# Altium PCB ALTAIR_PD_Sergeant_V26.4c.PcbDoc (part 2 of 4)
Units mm, origin at the board's own origin, x right, y up, seen from the top; angles counter-clockwise.
Board outline 74 x 56 mm, 4 copper layers (Top Layer, Layer 1, Layer 2, Bottom Layer), stack 1.675 mm thick; 239 components, 159 nets, 760 pads, 127 vias.
Unrouted connection lines stored in the file: 489.
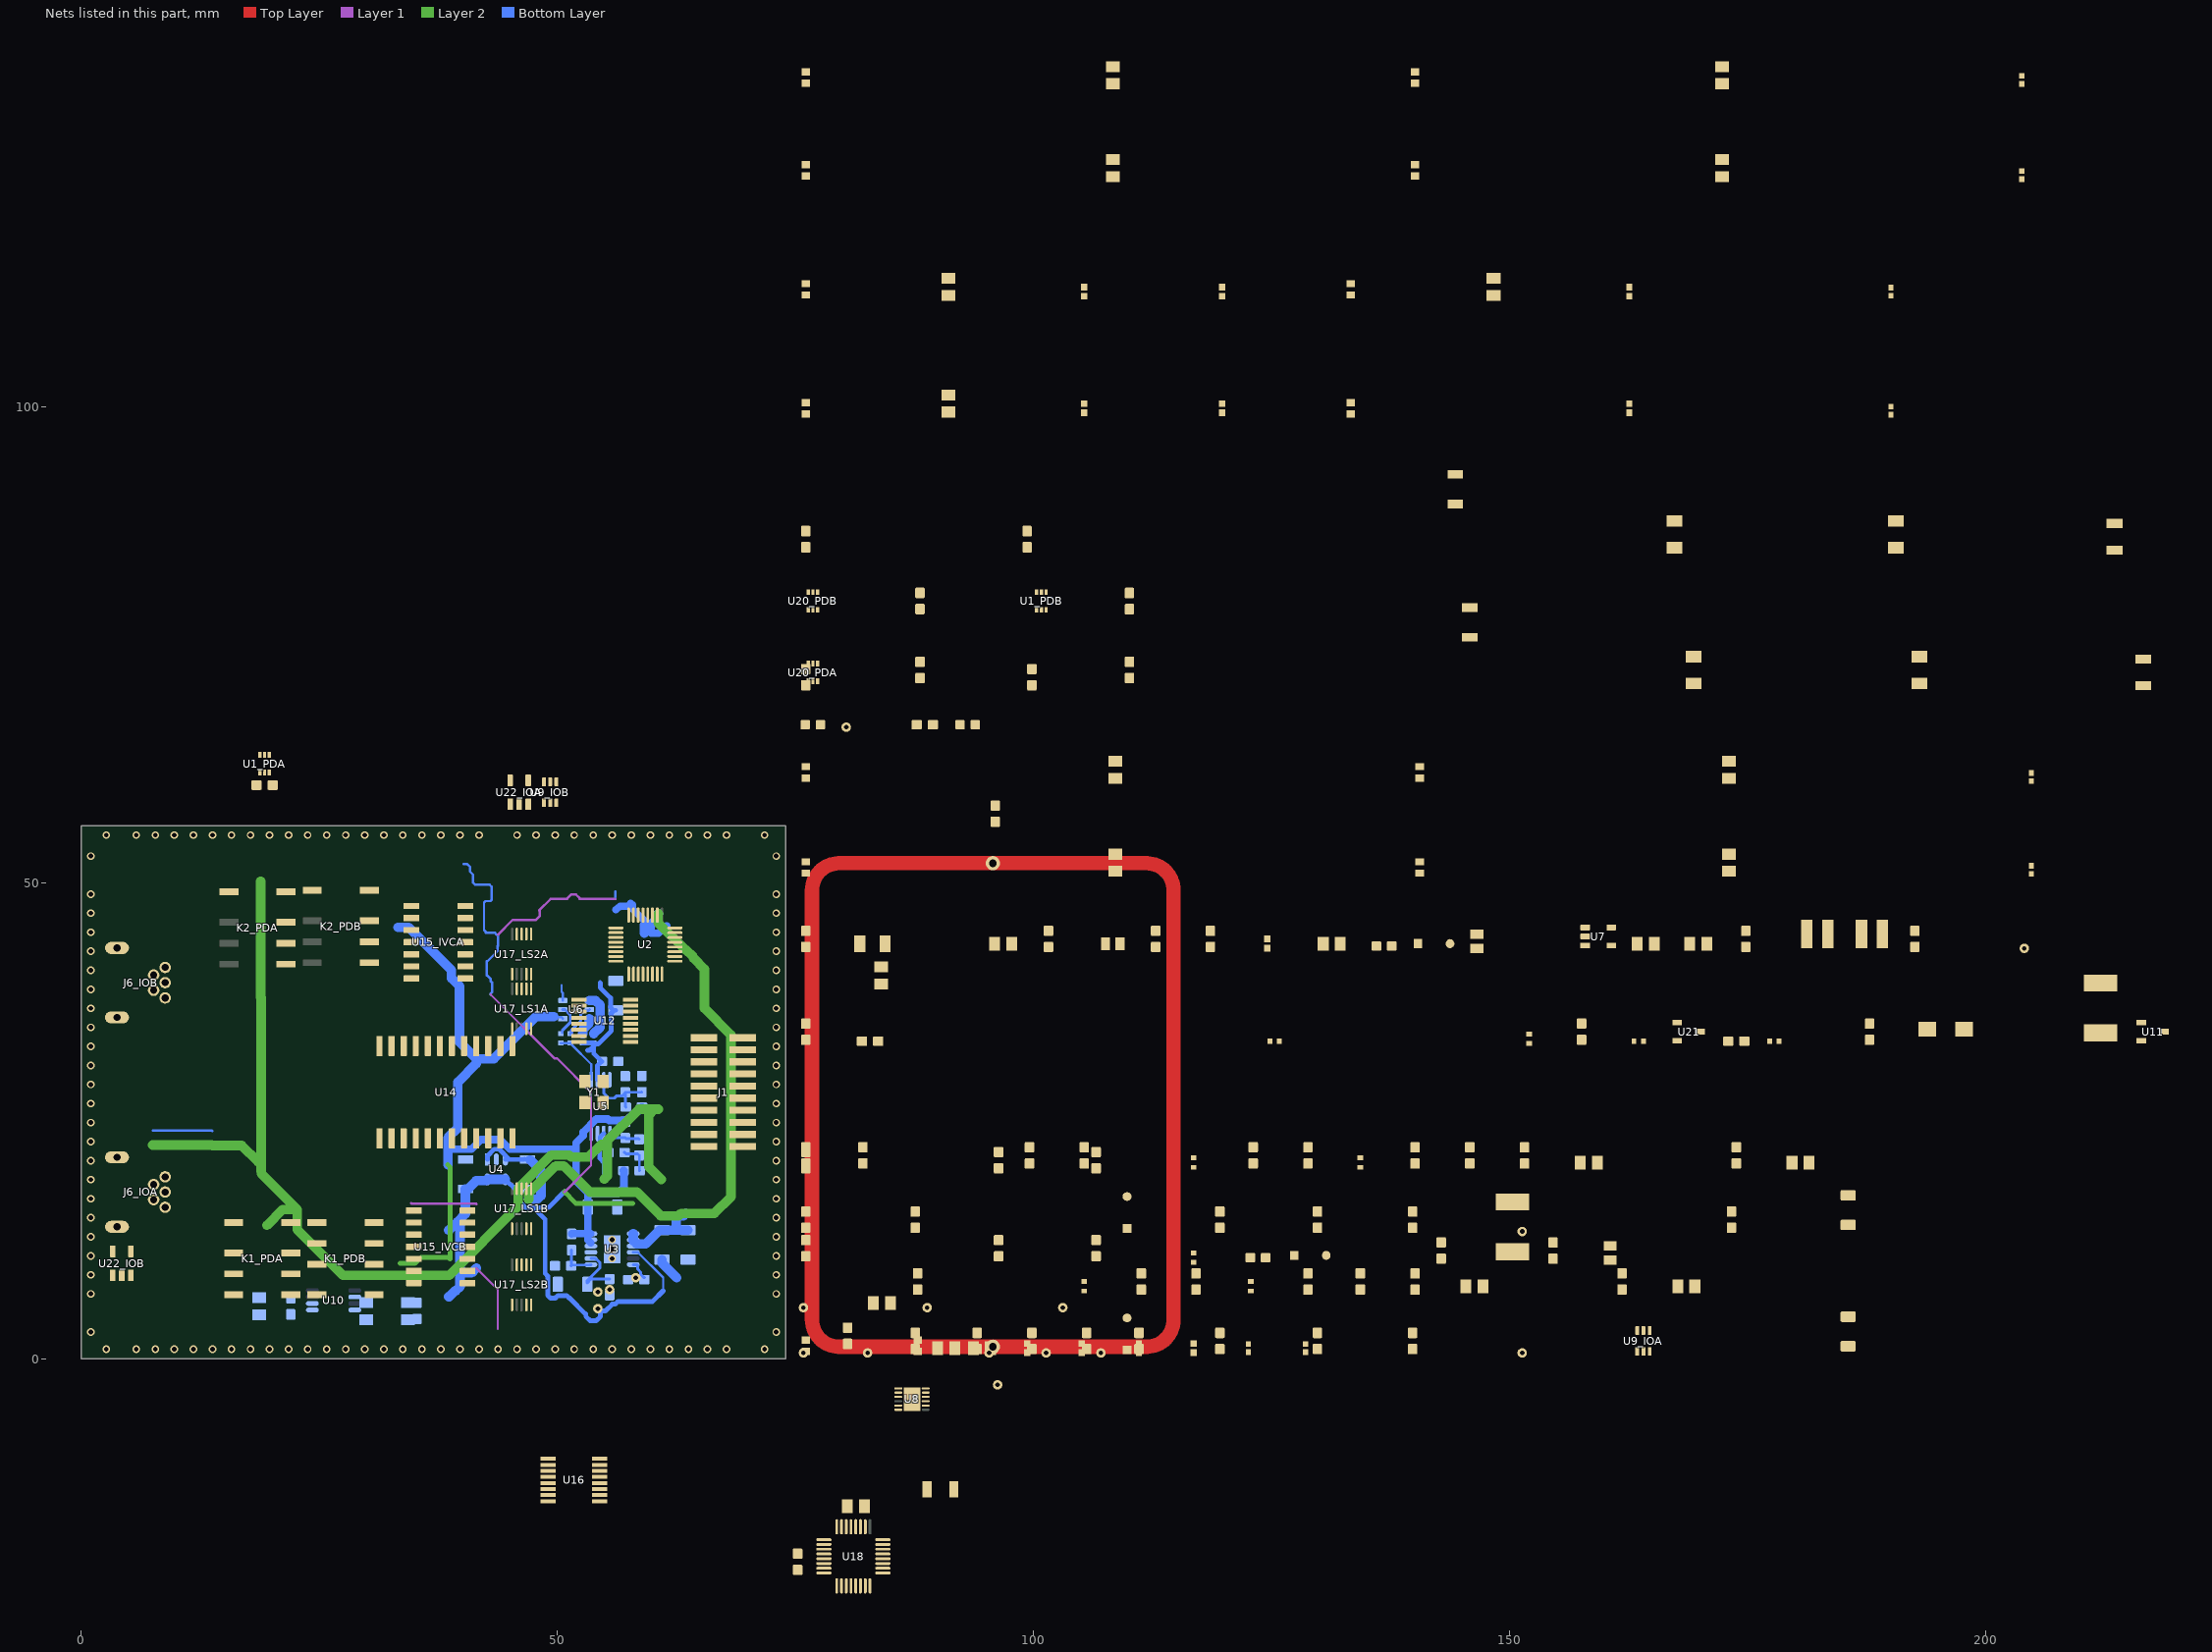
[diagram p4: the nets of this part, all layers, seen from the top]

## Part data
C00_IOA C0_IOA C00_IOB C0_IOB: library part CAP, "Murata GRT188R61H105KE13D - Cap Ceramic 1uF 10% 50V X5R 0603 (Placeholder)", MF=Murata, MP=GRT188R61H105KE13D
C1 C2 C3 C4 C12 C23_IOA C23_IOB: library part CAP, "Murata GRT319R6YA106KE01D - Cap Ceramic 10uF 35V X5R 10% Pad SMD 1206 85C Automotive T/R", MF=Murata, MP=GRT319R6YA106KE01D
C5 C10 C11 C13 C22_IOA C22_IOB C24 C25_PDA C25_PDB C26 C27 C29_PDA C29_PDB C32_IOA C32_IOB C33 C35 C37 C38_IVCA C38_IVCB C40_IVCA C40_IVCB C41 C42 C43_LS1A C43_LS1B C43_LS2A C43_LS2B C45_LS1A C45_LS1B C45_LS2A C45_LS2B C48 C50 C51 C53 C64 C65_PDA C65_PDB: library part CAP, "Kemet C0603C104K5RACAUTO - Cap Ceramic 0.1uF 50V X7R 10% 0603 125C Paper T/R", MF=Kemet, MP=C0603C104K5RACAUTO
C6 C7 C8 C14 C18 C19 C20 C34 C36 C39_IVCA C39_IVCB C44_LS1A C44_LS1B C44_LS2A C44_LS2B C46_LS1A C46_LS1B C46_LS2A C46_LS2B C47_IVCA C47_IVCB C49 C52 C54 C55 C67 C68: library part CAP, "Murata GRM21BR61E106KA73L - Cap Ceramic 10uF 10% 25V X5R 0805", MF=Murata, MP=GRM21BR61E106KA73L
C9 C15 C17 C28_PDA C28_PDB C69_IOA C69_IOB: library part CAP, "Murata GRT188R61H105KE13D - Cap MLCC AEC-Q200 X5R 1uF 50V 0603", MF=Murata, MP=GRT188R61H105KE13D
C16: library part CAP, "Kemet C1206C331J5GACTU - Cap Ceramic 330pF 50V 5% NP0 1206", MF=Kemet, MP=C1206C331J5GACTU
C21: library part CAP, "Kemet C0805C475K8PACTU - Cap Ceramic 4.7uF 10V X5R 0805", MF=Kemet, MP=C0805C475K8PACTU
C30_PDA C30_PDB: library part CAP, "Wurth Elektronik 885012008037 - Cap Ceramic 10pF 5% 50V NP0 1206", MF="Wurth Elektronik", MP=885012008037
C31_PDA C31_PDB: library part CAP, "Kemet C1206C301K5GACTU - Cap Ceramic 300pF 10% 50V NP0 1206", MF=Kemet, MP=C1206C301K5GACTU
C56 C57 C60 C61 C62 C63 C66: library part CAP, "Murata GCM1885C1H202FA16J 50V 2nF C0G ±1% 0603", MF=Murata, MP=GCM1885C1H202FA16J
C58 C59: library part CAP, "CL31B225KBHNNNE CAP CER 2.2UF 50V X7R 1206", MF="Samsung Electro-Mechanics", MP=CL31B225KBHNNNE
D1: library part Schottky, "DIODE SCHOTTKY 20V 500MA SOD123", Average Rectified Current=500mA, Case/Package=SOD-123-2, Forward Voltage=385mV, Max Forward Surge Current (Ifsm)=5.5A, Max Operating Temperature=125°C, Max Repetitive Reverse Voltage (Vrrm)=20V, Max Reverse Leakage Current=250uA, Min Operating Temperature=-65°C, Package Quantity=3000, Contact Plating=Tin, Current Rating=500mA, Element Configuration=Single, Forward Current=500mA, Height=1.12mm, Lead Free="Lead Free", Length=2.69mm, Max Reverse Voltage (DC)=20V, Max Surge Current=5.5A, MF=onsemi, MP=MBR0520LT1G, Number of Pins=2, Output Current=500mA, Packaging="Tape and Reel", Peak Non-Repetitive Surge Current=5.5A, Peak Reverse Current=250uA, Polarity=Standard, Radiation Hardening=No, REACH SVHC="No SVHC", Termination=SMD/SMT, Voltage Rating (DC)=20V, Width=1.6mm
D2 D3_IOA D3_IOB: library part Zener, "DIODE ZENER SOD123"
  D3_IOA D3_IOB: MF=onsemi, MP=MMSZ4679T1G
D4: library part Zener, "Vishay SMAJ12A-M3/61 - TVS Diode 12V Standoff 13.3V Breakdown DO-214AC", MF="Vishay General Semiconductor", MP=SMAJ12A-M3/61
D5 D6 D7 D8: library part LED-blue, "LED RED CLEAR 0603 SMD", Case Code (Imperial)=0603, Case Code (Metric)=1608, Color=Blue, Forward Current=30mA, Forward Voltage=3.2V, Max Operating Temperature=85°C, Min Operating Temperature=-40°C, Package Quantity=4000, Supplier Part Number 1=732-4966-1-ND, Test Current=20mA, Case/Package=0603, Category=LEDs, ComponentLink1Description=https://datasheet.ciiva.com/29563/150060bs75000-29563034.pdf?src-supplier=Digi-Key, ComponentLink1URL=https://datasheet.ciiva.com/29563/150060bs75000-29563034.pdf?src-supplier=Digi-Key, ComponentLink2Description=https://datasheet.ciiva.com/29279/759426-da-01-en-chipled-0603-w-kl-blau-150060bs75000-29279193.pdf?src-supplier=Conrad, ComponentLink2URL=https://datasheet.ciiva.com/29279/759426-da-01-en-chipled-0603-w-kl-blau-150060bs75000-29279193.pdf?src-supplier=Conrad, ComponentLink3Description=https://datasheet.ciiva.com/29563/150060bs75000-29563035.pdf?src-supplier=Digi-Key, ComponentLink3URL=https://datasheet.ciiva.com/29563/150060bs75000-29563035.pdf?src-supplier=Digi-Key, ComponentLink4Description=https://datasheet.ciiva.com/29563/150060bs75000-29563036.pdf?src-supplier=Digi-Key, ComponentLink4URL=https://datasheet.ciiva.com/29563/150060bs75000-29563036.pdf?src-supplier=Digi-Key, ComponentLink5Description=https://datasheet.ciiva.com/22656/1911343-22656939.pdf?src-supplier=Element14, ComponentLink5URL=https://datasheet.ciiva.com/22656/1911343-22656939.pdf?src-supplier=Element14, ComponentLink6Description=https://datasheet.ciiva.com/48430/150060bs75000-eng-tds-48430039.pdf?src-supplier=Distrelec, ComponentLink6URL=https://datasheet.ciiva.com/48430/150060bs75000-eng-tds-48430039.pdf?src-supplier=Distrelec, Dominant Wavelength=470nm, Height=0.7mm, Length=1.6mm, Lens Style=Clear,Rectangular, Luminous Intensity=145mcd, MF="Wurth Electronics", Mount="Surface Mount", MP=150060RS75000, Packaging="Cut Tape", REACH SVHC=Unknown, RoHS=Yes, Stock 1=66561, Supplier 1=Digi-Key, Viewing Angle=140°, Wavelength=470nm, Width=0.8mm
F1 F2: library part Polyfuse, "Bel Fuse 0ZCG0030FF2C - Polymeric PTC Resettable Fuse 30V 300mA hold 600mA trip SMD 1812", MF="Bel Fuse Inc.", MP=0ZCG0030FF2C
J1: Package=None, Availability=Unavailable, MF=Samtec, MP=FTSH-110-01-X-DV-K-TR, Price=None
J6_IOA J6_IOB: "Conn Mini-USB RCP 5 POS Solder ST Thru-Hole 5 Terminal 1 Port", Color=Black, Flammability Rating="UL94 V-0", Supplier Part Number 1=UE25BE5510H-ND, Category="USB Connectors", ComponentLink1Description=http://components.arrow.com/part/dataview/0323_00956300?src-supplier=Arrow+Europe, ComponentLink1URL=http://components.arrow.com/part/dataview/0323_00956300?src-supplier=Arrow+Europe, ComponentLink2Description=http://www.alliedelec.com/m/d/e7e3d7a920045eebbdef787e60d8b001.pdf?src-supplier=Allied+Electronics, ComponentLink2URL=http://www.alliedelec.com/m/d/e7e3d7a920045eebbdef787e60d8b001.pdf?src-supplier=Allied+Electronics, ComponentLink3Description=https://www.amphenolcanada.com/ProductSearch/drawings/AC/UE25BEX510X.pdf?src-supplier=Digi-Key, ComponentLink3URL=https://www.amphenolcanada.com/ProductSearch/drawings/AC/UE25BEX510X.pdf?src-supplier=Digi-Key, Contact Material="Copper Alloy", Contact Plating=Gold, Features="High Temperature", Gender=Female, Lead Free="Lead Free", MF="Amphenol Commercial", Mount="Through Hole", MP=UE25BE5510H, Number of Contacts=5, Number of Positions=5, RoHS=Yes, Stock 1=6446, Supplier 1=Digi-Key, Termination=PCB
K1_PDA K1_PDB K2_PDA K2_PDB: "RelÃ© RF, CC, biestable, 1 bobina, 2 conectores DPDT-CO de forma C, capacidad de contacto de 2 A, voltaje de bobina de 4,5 V CC, voltaje de contacto de 250 V CA, Axicom IM", Package=None, Check_prices=https://www.snapeda.com/parts/3-1462037-1/TE+Connectivity+Potter+%2526+Brumfield+Relays/view-part/?ref=eda, EU_RoHS_Compliance=Compliant, MF="TE Connectivity", MP=3-1462037-1, SnapEDA_Link=https://www.snapeda.com/parts/3-1462037-1/TE+Connectivity+Potter+%2526+Brumfield+Relays/view-part/?ref=snap
L1 L2: library part IND, "TDK VLS3012CX-100M-1 - Inductor 10uH 20% 1.25A 0.324Ohm NonstandardPkg", DC Resistance (DCR)=324mR, Inductance Tolerance=20%, Max DC Current=1.25A, Max Operating Temperature=105°C, Min Operating Temperature=-40°C, Resistor Type=Wirewound, Saturation Current=1A, Test Frequency=100kHz, Core Material=Ferrite, Height=1.20mm, Height - Seated (Max)=0.047inch, Inductance=10uH, Lead Free="Lead Free", Length=3.00mm, MF="TDK Corporation", Mount="Surface Mount", MP=VLS3012CX-100M-1, Number of Pins=2, Packaging="Tape and Reel", Series=VLS-CX-1, Termination=SMD/SMT, Tolerance=20%, Width=3.00mm
R0_IOA R0_IOB R7_IVCA R7_IVCB R54 R57: library part RES, "Yageo RC0402JR-070RL - Res 0 Ohms 1/16W SMD 0402", MF=YAGEO, MP=RC0402JR-070RL
R1 R6 R17 R21 R22: library part RES, "Vishay CRCW060310K0FKEA SMD 0603 10k, CRCW e3 Series, 75V, thick film, 100mW", MF="Vishay Dale", MP=CRCW060310K0FKEA
R2 R5 R11 R13 R20 R25 R26 R64 R65: library part RES, "Stackpole RMCF0402JT47R0 - Res 47Ohm 5% 0.063W 0402 Thick Film AEC-Q200 compliant", MF="Stackpole Electronics Inc.", MP=RMCF0402JT47R0
R3 R38: library part RES, "Yageo RC0402FR-0733RL - Res 33Ohm 1% 1/16W 0402", MF=YAGEO, MP=RC0402FR-0733RL
R4 R18: library part RES, "Panasonic ERJ-3EKF6800V - Res SMD 680 Ohm 1% 1/10W 0603", MF="Panasonic Electronic Components", MP=ERJ-3EKF6800V
R8_IVCA R8_IVCB R9_IVCA R9_IVCB R10_IVCA R10_IVCB R52 R53 R55 R56: library part IMPEDANCE, "Yageo RC0402JR-070RL - Res 0 Ohms 1/16W SMD 0402", MF=YAGEO, MP=RC0402JR-070RL
R12 R19 R33 R37 R73 R74 R75: library part RES, "Panasonic ERJ-3EKF2001V Res Thick Film 0603 2K Ohm 1% 1/10W ±100ppm/°C", MF="Panasonic Electronic Components", MP=ERJ-3EKF2001V
R14: library part RES, "Vishay CRCW06030000Z0EA - Res 0 Ohms 1/8W SMD 0603", MF="Vishay Dale", MP=CRCW06030000Z0EA
R15: library part RES, "Panasonic ERA-3ARB104V - Res SMD 0603 0.1% 0.10W T.C. 10ppm 100K", MF="Panasonic Electronic Components", MP=ERA-3ARB104V
R16 R39_IOA R39_IOB R40_IOA R40_IOB: library part RES, "Vishay MCT06030C3003FP500 - Res SMD 300kOhm 1% 1/10W 0603", MF="Vishay Dale", MP=MCT06030C3003FP500
R23: library part RES, "Vishay TNPW06032K32BEEA - Res 2.32k 0.1% 0.21W SMD 0603", MF="Vishay Dale", MP=TNPW06032K32BEEA
R24: library part RES, "KOA Speer RN73R1JTTD2231B25 - Res 2.23k 0.1% 1/10W SMD 0603", MF="KOA Speer Electronics, Inc.", MP=RN73R1JTTD2231B25
R27 R28: library part RES, "Yageo RL0402JR-070R1L - Res 0.1Ohm 5% 1/16W SMD 0402", MF=YAGEO, MP=RL0402JR-070R1L
R29: library part RES, "Panasonic ERA-6AEB303V - Res 30kOhm 0.1% 1/8W 0805", MF="Panasonic Electronic Components", MP=ERA-6AEB303V
R30: library part RES, "Yageo RC0402FR-071KL - Res 1kOhm 1% 1/16W 0402", MF=YAGEO, MP=RC0402FR-071KL
R31: library part RES, "Vishay TNPU12061K50BZEN00 - Res 1.5kOhm 0.1% 1/4W 1206", MF="Vishay Dale", MP=TNPU12061K50BZEN00
R32: library part RES, "Panasonic ERA-3AEB114V - Res 110k 0.1% 1/10W SMD 0603", MF="Panasonic Electronic Components", MP=ERA-3AEB114V
R34 R35: library part RES, "Panasonic ERJ-3GEYJ104V - Res 100k 5% 1/10W SMD 0603", MF="Panasonic Electronic Components", MP=ERJ-3GEYJ104V
R36 R77 R78 R79: library part RES, "Panasonic ERJ-U03F1001V - Res SMD 1 kOhm 1% 1/10W 0603", MF="Panasonic Electronic Components", MP=ERJ-U03F1001V
R45_PDA R45_PDB: library part RES, "Vishay TNPV12061M00BYEN - Res 1MOhm 0.1% 1/4W SMD 1206", MF="Vishay Dale", MP=TNPV12061M00BYEN
R46_PDA R46_PDB: library part RES, "Stackpole RNCF1206TKY10K0 - Res 10k 0.01% 1/4W SMD 1206", MF="Stackpole Electronics Inc.", MP=RNCF1206TKY10K0
R62_LS1A R62_LS1B R62_LS2A R62_LS2B: library part RES, "Panasonic ERA-2AEB5111X - Res 5.11k 0.1% 1/16W SMD 0402", MF="Panasonic Electronic Components", MP=ERA-2AEB5111X
Rsense1: library part RES
RT1_IOA RT1_IOB: library part "THERM_RES NTC 0603 10K 1%", "THERMISTOR NTC 10KOHM 3380K 0603", Case Code (Imperial)=0603, Case Code (Metric)=1608, Max Operating Temperature=125°C, Min Operating Temperature=-40°C, Supplier Part Number 1=490-16279-1-ND, Case/Package=0603, Category=Thermistors, ComponentLink1Description=http://www.farnell.com/datasheets/2095755.pdf?src-supplier=Farnell, ComponentLink1URL=http://www.farnell.com/datasheets/2095755.pdf?src-supplier=Farnell, ComponentLink2Description=https://www.murata.com/en-us/products/productdata/8796836233246/L0770E.pdf?src-supplier=Digi-Key, ComponentLink2URL=https://www.murata.com/en-us/products/productdata/8796836233246/L0770E.pdf?src-supplier=Digi-Key, ComponentLink3Description=http://www.farnell.com/datasheets/2095755.pdf?src-supplier=Element14, ComponentLink3URL=http://www.farnell.com/datasheets/2095755.pdf?src-supplier=Element14, MF=Murata, MP=NCU18XH103F60RB, REACH SVHC="No SVHC", RoHS=No, Stock 1=48580, Supplier 1=Digi-Key
SH: "(Plated) Mounting hole"
U1_PDA U1_PDB U20_PDA U20_PDB: "Bipolar Motor Driver NMOS PWM SOT-563"
U2 U18: "24BIT ADC Delta-Sigma 4k samples/s PGA V-reference", Case/Package=LQFP, Max Operating Temperature=125°C, Min Operating Temperature=-50°C, Supplier Part Number 1=296-45170-1-ND, Category="Analog to Digital Converters (ADCs)", ComponentLink1Description=http://www.ti.com/general/docs/lit/getliterature.tsp?genericPartNumber=ADS124S08&fileType=pdf&src-supplier=Farnell, ComponentLink1URL=http://www.ti.com/general/docs/lit/getliterature.tsp?genericPartNumber=ADS124S08&fileType=pdf&src-supplier=Farnell, ComponentLink2Description=http://www.ti.com/lit/ds/symlink/ads124s06.pdf?src-supplier=Digi-Key, ComponentLink2URL=http://www.ti.com/lit/ds/symlink/ads124s06.pdf?src-supplier=Digi-Key, Interface=SPI, MF="Texas Instruments", Mount="Surface Mount", MP=ADS124S08IPBSR, Number of A/D Converters=1, Number of Bits=24, Number of Inputs=12, Number of Pins=32, Packaging="Tape and Reel", RoHS=No, Sampling Rate=4000S/s, Stock 1=2523, Supplier 1=Digi-Key
U3: "20V 500mA Ultralow Noise Ultrahigh PSRR Adjustable Linear Regulator 260V Dropout MSOP-12", Case/Package=MSOP, Dropout Voltage=260mV, Max Operating Temperature=125°C, Min Current Limit=570mA, Min Operating Temperature=-40°C, Output Current=500mA, Output Voltage=15V, Supplier Part Number 1=LT3045EMSE#PBF-ND, ComponentLink1Description=http://www.farnell.com/datasheets/2163219.pdf?src-supplier=Farnell, ComponentLink1URL=http://www.farnell.com/datasheets/2163219.pdf?src-supplier=Farnell, ComponentLink2Description=http://www.linear.com/docs/55649?src-supplier=Digi-Key, ComponentLink2URL=http://www.linear.com/docs/55649?src-supplier=Digi-Key, MF="Analog Devices / Linear Technology", MP=LT3045EMSE#PBF, Number of Regulators=1, RoHS=Yes, Stock 1=1588, Supplier 1=Digi-Key
U4: library part ADP7142AUJZ-R7, "1.2-40V 200mA Low Noise CMOS LDO Adjustable Linear Regulator TSOT23", Ambient Temperature Range High=+125°C, Ambient Temperature Range Low=-40°C, Dropout Voltage=200mV, Manufacturer="Analog Devices", Max Junction Temp=+150°C, Max Supply Voltage=40V, Min Supply Voltage=2.7V, Nominal Supply Current=50-180uA, Output Current=200mA, Output Voltage=1.2-5V, Package=UJ-5, Temperature="-40°C to +125°C", Accuracy Percentage=0.8%, Automotive=No, Category=IC, ComponentLink2Description=Datasheet, ComponentLink2URL=https://www.analog.com/media/en/technical-documentation/data-sheets/ADP7142.pdf, Device Class L1="Integrated Circuits (ICs)", Device Class L2="Power Management ICs", Device Class L3="Voltage Regulators - Linear", Digikey Description="IC REG LIN POS ADJ 200MA TSOT23", Height=1mm, Lead Free=Yes, Manufacturer Part Number=ADP7142AUJZ-R7, MF="Analog Devices", Mouser Description="LDO Regulator Pos 1.5V to 5V 0.2A 5-Pin TSOT-23 T/R", MP=ADP7142AUJZ-5.0-R7, Number of Outputs=1, Octopart=https://octopart.com/adp7142aujz-r7-analog+devices-38928114, Output Type=AdjustableProgrammable, RoHS=TRUE, Temperature Range High=+125°C, Temperature Range Low=-40°C
U5: library part OPA2182IDBV, "Op amp, 2 Channel, Highest-precision, 36-V, 5-MHz, single, low-noise, zero-drift, MUX-friendly amplifier 8VSSOP -40 to 125", MF="Texas Instruments", MP=OPA2182IDGKR
U6: "BJT Array, 1NPN 1PNP, VCE(sat) 375mV, hFE 300, Breakdown 30V, 6-SOT-23", MF="Diodes Incorporated", MP=ZXTC2045E6TA
U7: library part LM2611AMF, "1.4MHz Cuk Converter, 5-pin SOT-23, Pb-Free", PackageTopMarking=S40A*XTT, PowerWise=N, ComponentLink1Description="Datasheet URL", ComponentLink1URL=http://www.ti.com/general/docs/lit/getliterature.tsp?genericPartNumber=LM2611&fileType=pdf, CompType=Switcher, MF="Texas Instruments", MP=LM2611AMF/NOPB, PackageDescription="Molded SOT-23, .115 x .063 x .040 in Body, 5 Lead, .0375 in Pitch", PackageReference=DBV0005A, PinCount=5, RoHS=Y
U8: "-20V 500mA Ultralow Noise Ultrahigh PSRR Adjustable Negative Linear Regulator 12DFN", MF="Analog Devices", MP=LT3094EDD#PBF, RoHS Compliant=Yes
U9_IOA U9_IOB: "DAC 8bit 1 channel SPI Supply Reference Buffered Voltage", MF="Texas Instruments", MP=DAC5311IDCKR
U10: library part REF5050IDGKR, "2.5V±0.05% Voltage Reference 8VSSOP", Case/Package=VSSOP, Max Input Voltage=18V, Max Operating Temperature=125°C, Max Output Current=10mA, Max Output Voltage=5V, Min Input Voltage=5.2V, Min Operating Temperature=-40°C, Nominal Supply Current=800uA, Operating Supply Current=1.2mA, Package Quantity=1, Supplier Part Number 1=296-27505-1-ND, Temperature Coefficient=3ppm/°C, Tolerance=0.05%, Category="Voltage References", ComponentLink1Description=https://datasheet.ciiva.com/2007/ref5020-2007532.pdf?src-supplier=Digi-Key, ComponentLink1URL=https://datasheet.ciiva.com/2007/ref5020-2007532.pdf?src-supplier=Digi-Key, ComponentLink2Description=https://datasheet.ciiva.com/14197/ref5050-14197084.pdf?src-supplier=Avnet, ComponentLink2URL=https://datasheet.ciiva.com/14197/ref5050-14197084.pdf?src-supplier=Avnet, ComponentLink3Description=https://datasheet.ciiva.com/2007/ref5020-2007533.pdf?src-supplier=Digi-Key, ComponentLink3URL=https://datasheet.ciiva.com/2007/ref5020-2007533.pdf?src-supplier=Digi-Key, ComponentLink4Description=https://datasheet.ciiva.com/2007/ref5020-2007534.pdf?src-supplier=Digi-Key, ComponentLink4URL=https://datasheet.ciiva.com/2007/ref5020-2007534.pdf?src-supplier=Digi-Key, ComponentLink5Description=https://datasheet.ciiva.com/41462/001014471-da-01-en-ic-vref-series-ref5050idgkr-vssop-8-tid-41462326.pdf?src-supplier=Conrad, ComponentLink5URL=https://datasheet.ciiva.com/41462/001014471-da-01-en-ic-vref-series-ref5050idgkr-vssop-8-tid-41462326.pdf?src-supplier=Conrad, Lead Free="Lead Free", MF="Texas Instruments", Min Output Voltage=5V, MP=REF5025IDGKR, Number of Channels=1, Number of Pins=8, Output Current=10mA, Output Type=Fixed, Output Voltage=5V, Packaging="Tape and Reel", Pricing 1="1=6.18000, 10=5.58100, 25=5.32200, 100=4.41320, 250=4.02380, 500=3.76420, 1000=3.45268 (USD)", Quiescent Current=800uA, Radiation Hardening=No, Reference Type=Series, RoHS=Yes, Stock 1=2539, Supplier 1=Digi-Key, Weight=0.00067oz
U11: library part PMOS, "MOSFET P-CH 30V 5A SOT23-3", MF="Vishay Siliconix", MP=SI2347DS-T1-GE3, Supplier 1=Avnet, Supplier Part Number 1=SI2347DS-T1-GE3
U12 U16: "Digital Isolator 6-Channel 6/0 Inputs 16SSOP", MF="Texas Instruments", MP=ISO7760DBQR
U14: "Low Noise, Dual Switched Integrator, 14.5 to 36 V, -40 to 125 degC, 24-pin SOIC (DW24), Green (RoHS & no Sb/Br)", Rating=Catalog, Total Supply Voltage(Max)(+5V is 5, +/-5V is 10)=36, Total Supply Voltage(Min)(+5V is 5, +/-5V is 10)=14.5, Code_JEDEC=MS-013, ComponentLink1Description="Manufacturer URL", ComponentLink1URL=http://www.ti.com/, ComponentLink2Description=Datasheet, ComponentLink2URL=http://www.ti.com/lit/ds/symlink/acf2101.pdf, ComponentLink3Description="Package Specification", ComponentLink3URL=http://www.ti.com/litv/pdf/mpds174a, DatasheetVersion=SBFS003, Eco-Plan="Green (RoHS & no Sb/Br)", GBW(Typ)(MHz)=2, Iq per channel(Max)(mA)=15, MF="Texas Instruments", Mounting Technology="Surface Mount", MP=ACF2101BU, Number of Channels=2, Offset Drift(Typ)(uV/C)=1, PackageDescription="24-Pin Plastic Small Outline, Body 15.4 x 7.5 mm, Pitch 1.27 mm", PackageReference=DW0024A, PackageVersion="4040000-5/G, 01/2011", Packing=TUBE, Slew Rate(Typ)(V/us)=3, Sub Family="Precision Amplifier", Vio (25C)(Max)(mV)=2
U15_IVCA U15_IVCB: library part IVC102/SO_5, "Precision Switched Integrator Transimpedance Amplifier", MF="Texas Instruments", MP=IVC102U, Part Reference=U1
U17_LS1A U17_LS1B U17_LS2A U17_LS2B: library part LT1991IMS#TRPBF, "Programmable Gain Amplifier - Single Channel, Precision, -13 to 14 Gain Selectable Operational Amplifier, 0.56 MHz Typical GBW, 0.12 V/us Typical SR, 2.4 to 40 V, 10-Pin SOP (MS-10), Industial, Pb-Free, Reel", Linear Technology Part Number=LT1991, Channels (#)=1, ComponentLink1Description="Manufacturer URL", ComponentLink1URL=http://www.linear.com/, ComponentLink2Description=Datasheet, ComponentLink2URL=http://cds.linear.com/docs/en/datasheet/1991fh.pdf, ComponentLink3Description="Package Specification", ComponentLink3URL=http://cds.linear.com/docs/en/packaging/MSOP_10_05-08-1661.pdf, DatasheetVersion="Rev. H", GBW (MHz) Typical=0.56, Is (mA) Typical=0.1, MF="Linear Technology", Mounting Technology="Surface Mount", MP=LT1991AIMS#PBF, PackageDescription="10-Lead Plastic MSOP, Body 3 x 3 mm, Pitch 0.5 mm", PackageReference=LT-MS-10, PackageVersion="Rev E", Packing=Reel, RevisionNote="URLs updated", RoHS=Pb-Free, SR (V/us) Typical=0.12, Type=SGA, Vos (mV) Guaranteed=0.05, Vos (mV) Typical=0.015, Vs Max (V)=40, Vs Min (V)=2.4
U21: library part PMOS_LV, "P-Channel 30 V 6A (Ta) 1W (Ta) Surface Mount SOT-23F", Supplier Part Number 1=SI2347DS-T1-GE3, MF=Toshiba, MP=SSM3J332R,LF, Supplier 1=Avnet
U22_IOA U22_IOB: "Single, ultra-high-precision (10 Î¼V) zero-drift (0.01 Î¼V/Â°C) low-input-bias-current op amp", Package=None, Check_prices=https://www.snapeda.com/parts/TLV387DBVR/Texas+Instruments/view-part/?ref=eda, MF="Texas Instruments", MP=TLV387DBVR, SnapEDA_Link=https://www.snapeda.com/parts/TLV387DBVR/Texas+Instruments/view-part/?ref=snap
Y1: "MEMS OSC XO 4.096MHZ H/LVCMOS", Case/Package=SMD/SMT, Max Supply Current=4.5mA, Height=0.032inch, MF=SiTime, Mount="Surface Mount", MP=SiT1602BC-21-XXN-4.096000, RoHS Compliant=Yes, Series=SIT1602, Width=0.098inch

## Via types
v1: diameter 0.8, hole 0.5, Top Layer to Bottom Layer, 122 vias
v2: diameter 0.6, hole 0.3, Top Layer to Bottom Layer, tented both sides, 5 vias

## Nets (pads, with @x,y where several pads share a name; then routed paths per layer and width w, separated by ;. In a path a pad name is that pad's centre, name@x,y a point inside that pad or via, vN(x,y) a via of type N, cw(c..) or ccw(c..) an arc to the next point about the centre after c; other vN are vias at no path point)
3V3: C37.2 C48.2 C49.2 C53.2 C54.2 R1.1 R6.2 R36.2 U2.15 U2.16 U18.15 U18.16 U21.2 Y1.4
4V9: C00_IOA.1 C0_IOA.1 C0_IOB.1 C00_IOB.1 C12.2 C13.2 C22_IOA.1 C22_IOB.1 C23_IOA.1 C23_IOB.1 C27.1 C33.1 C34.1 C35.1 C36.1 C38_IVCA.1 C38_IVCB.1 C39_IVCA.1 C39_IVCB.1 C40_IVCA.1 C40_IVCB.1 C42.1 C47_IVCA.1 C47_IVCB.1 D3_IOA.2 D3_IOB.2 R4.2 R7_IVCA.2 R7_IVCB.2 R27.1 R28.1 R37.1 R52.1 R54.2 R55.1 R57.2 TP5.1 U5.2 U9_IOA.5 U9_IOB.5 U12.9 U14.4 U14.5 U14.9 U14.16 U14.20 U14.21 U15_IVCA.7 U15_IVCA.8 U15_IVCA.13 U15_IVCB.7 U15_IVCB.8 U15_IVCB.13 U16.9 U16.10 U16.11 | length 14.5
  Bottom Layer w0.5: R27.1@52.675,33.15 R28.1@53.825,33.15 ; 53.18,32.374 53.199,32.394 53.39,32.394 53.825,32.829 ; U5.2@54.225,29.3 54.225,30.8 C13.2@54.65,31.225 ; 54.5,39.5 54.519,39.481 54.519,38.981 55.6,37.9 55.6,36.9 55.9,36.6 C12.2@55.906,36.6 ; C13.2@54.7,31.225 C13.2@54.65,31.225 ; C12.2@56.15,36.6 55.97,36.6 55.67,36.3 55.67,34.445 54.276,33.051 54.048,33.051 53.825,32.829 ; 53.825,32.829 53.825,32.05 C13.2@54.65,31.225
10V: C4.2 C5.1 C6.2 C9.2 C22_IOA.2 C22_IOB.2 C23_IOA.2 C23_IOB.2 C27.2 C35.2 C36.2 C38_IVCA.2 C38_IVCB.2 C39_IVCA.2 C39_IVCB.2 C42.2 C43_LS1A.2 C43_LS1B.2 C43_LS2A.2 C43_LS2B.2 C44_LS1A.2 C44_LS1B.2 C44_LS2A.2 C44_LS2B.2 R16.2 R18.2 R21.2 R23.2 TP3.1 U3.10 U3.11 U3.12 U5.8 U6.1 U9_IOA.4 U9_IOB.4 U10.2 U12.16 U14.13 U15_IVCA.14 U15_IVCB.14 U16.16 U17_LS1A.7 U17_LS1B.7 U17_LS2A.7 U17_LS2B.7 | length 99
  Layer 2 w0.5: 33.5,10 35.058,10 35.681,10.623 38.58,10.623 38.723,10.48 38.75,10.48 38.75,20.1 38.5,20.35 38.5,20.377
  Bottom Layer w0.254: 49.623,35.932 49.689,35.866 50.434,35.866 U6.1@50.575,35.725
  Bottom Layer w0.8: 38.5,22 40.973,22 41.973,23 44,23 45,22 51.962,22 ; R16.2@51.5,13.1 51.525,13.125 U3.12@53.2,13.125 ; 53.525,12.15 53.2,12.475 U3.12@53.2,13.125 ; U3.12@53.525,13.125 U3.12@53.2,13.125 ; C9.2@56.95,19.75 57,19.75 57,17.987 56.414,17.401 53.2,17.401 ; R23.2@58.9,26.425 58.85,26.425 58.75,26.325 58.75,26.253 57.895,25.398 57.623,25.398 57.25,25.025 55.45,25.025 55.293,25.182 54.106,25.182 52.731,23.807 52.731,23.43 51.978,22.677 51.978,22.016 51.962,22 ; 51.962,22 51.962,18.638 53.2,17.401 ; U3.12@53.2,13.125 C4.2@53.2,15.925 53.2,17.401
  Bottom Layer w1: 33.263,45.323 34.352,45.323 38.878,40.797 38.878,39.978 39.723,39.132 39.723,33.277 41.5,31.5 ; 38.5,20.377 38.5,22 38.5,23.203 39.551,24.255 39.551,29.051 41.5,31 41.5,31.5 ; 49.623,35.932 47.777,35.932 43.345,31.5 41.5,31.5
-11V: C20.1 C33.2 C34.2 C40_IVCA.2 C40_IVCB.2 C45_LS1A.2 C45_LS1B.2 C45_LS2A.2 C45_LS2B.2 C46_LS1A.2 C46_LS1B.2 C46_LS2A.2 C46_LS2B.2 C47_IVCA.2 C47_IVCB.2 R79.2 TP1.1 U8.10 U8.11 U8.12 U14.12 U15_IVCA.9 U15_IVCB.9 U17_LS1A.4 U17_LS1B.4 U17_LS2A.4 U17_LS2B.4
-11V_EN: C28_PDA.2 C28_PDB.2 C29_PDA.2 C29_PDB.2 C50.2 C51.2 C52.2 C55.2 C58.1 C64.2 C69_IOA.2 C69_IOB.2 R34.1 R35.1 TP16.1 U2.26 U3.4 U4.4 U4.5 U7.4 U8.3 U18.26 U22_IOA.5 U22_IOB.5 | length 135
  Layer 1 w0.254: 41.5,9.5 43.749,7.251 43.749,3.129 ; 43,38.25 49.697,31.553 49.962,31.553 53.545,27.97 53.545,20.304 50.75,17.509 50.75,17.5 ; 43.75,44.528 45.325,46.103 47.232,46.103 47.768,46.103 48.147,46.482 48.147,47.018 48.082,47.082 49.301,48.301 51.053,48.301 51.053,48.368 51.432,48.747 51.968,48.747 52.347,48.368 52.347,48.301 56.115,48.301
  Layer 2 w0.5: 50.758,17.549 50.758,17.522 51.295,16.984 51.295,16.955 51.927,16.323 57.924,16.323
  Bottom Layer w0.254: 40.16,51.967 40.175,51.951 40.546,51.951 40.829,51.668 40.829,51.171 41.146,50.854 41.146,50.02 41.366,49.8 42.884,49.8 43.104,49.58 43.104,48.22 42.955,48.071 42.451,48.071 42.302,47.922 42.302,45.048 42.6,44.75 ; 42.5,44.75 43.441,44.75 43.663,44.528 43.75,44.528 43.75,43.37 43.719,43.339 43.719,42.819 42.65,41.75 42.6,41.75 42.6,40.25 42.65,40.25 43.023,39.877 43.023,39.642 43.147,39.518 43.147,38.491 43,38.344 43,38.25 ; 56.1,49.075 56.115,49.06 56.115,48.301 ; U3.4@57.975,11.175 58.463,11.175 61.125,8.513 61.125,7.125
  Bottom Layer w0.5: U4.4@44.55,18.825 45.673,17.702 45.673,16.835 46.637,15.871 47.504,15.871 ; 50.758,17.549 49.08,15.871 47.504,15.871 ; 61.125,7.125 59.997,5.997 56.357,5.997 56.083,5.723 55.776,5.723 55.069,5.016 54.557,5.016 54.538,4.997 54.538,4.431 54.087,3.98 53.449,3.98 52.998,4.431 52.998,4.697 52.973,4.697 51.321,6.349 51.263,6.349 50.989,6.623 50.057,6.623 49.784,6.349 49.293,6.349 49,6.642 49,8.67 48.725,8.945 48.725,14.65 47.504,15.871
  Bottom Layer w1: 38.6,6.5 38.65,6.5 39.273,7.123 39.336,7.123 39.777,7.564 39.777,9 ; 38.6,13.5 38.65,13.5 39.5,14.35 ; C58.1@40.35,17.825 40.35,15.2 39.5,14.35 ; C58.1@40.6,17.825 41.473,18.698 42.523,18.698 U4.5@42.65,18.825 U4.4@44.55,18.825 ; 41.5,9.5 41,9 39.777,9 ; 39.5,14.35 39.777,14.073 39.777,9
-16V: C16.1 C18.1 C19.1 L2.2 R29.2 U8.1 U8.2 U8.5 U8.13
\DRDY1: J1.01 R65.2
\DRDY2: J1.19 R20.2
\SPI_CS1: J1.04 U2.9
\SPI_CS2: J1.16 U18.9
\SYS_RESET: J1.06 R2.1
A2V5: C8.2 C24.1 TP2.1 U2.7 U2.30 U10.6 U17_LS1A.1 U17_LS1B.1 U17_LS2A.1 U17_LS2B.1 U18.7 U18.30 | length 6.9
  Layer 1 w0.254: 34.642,16.33 34.681,16.29 41.46,16.29 41.5,16.25
A5VSW: C25_PDA.2 C25_PDB.2 C26.2 C41.2 C65_PDA.2 C65_PDB.2 TP6.1 U1_PDA.5 U1_PDB.5 U5.6 U5.7 U12.1 U16.1 U20_PDA.5 U20_PDB.5 | length 119.9
  Layer 2 w1: 7.5,22.44 13.71,22.44 13.75,22.4 16.85,22.4 18.561,20.689 18.885,20.689 ; 18.838,50.163 18.838,44.067 18.838,37.971 18.885,37.923 18.885,31.874 18.885,25.802 18.909,25.778 18.885,25.754 18.885,20.689 ; 19.5,14 21.169,15.669 22.669,15.669 ; 54.928,18.87 55.254,19.196 55.254,22.5 ; 60.206,26.209 59.609,25.612 59.609,20.132 60.917,18.823 ; 60.606,26.209 58.577,26.209 55.254,22.886 55.254,22.5 ; 18.885,20.689 18.885,19.706 18.909,19.682 18.909,19.429 22.669,15.669 ; 22.669,15.669 22.669,13.558 27.481,8.746 28.613,8.746 28.617,8.75 38.636,8.75 45.873,15.987 45.873,17.873 49.387,21.387 51.246,21.387 51.446,21.187 53.305,21.187 54.618,22.5 55.254,22.5
  Bottom Layer w0.5: U5.6@54.875,23.65 54.5,23.275 54.5,22.285 54.448,22.233 54.448,21.067 54.928,20.587 54.928,18.87
ACF_CHA_ADCIN: C62.2 R74.2 U2.3
ACF_CHB_ADCIN: C57.2 R19.2 U18.3
ACF_HOLD: J1.11 U16.5
ACF_RESET: J1.09 U16.4
ADC_RESET: R1.2 R2.2 U2.18 U18.18
CSENSE_CHA_ADCIN: TP11.1 U2.6
DRDY_CHA: R65.1 U2.13
GUARD_IOA: J6_IOA.4 K1_PDA.7
GUARD_IOB: J6_IOB.4 K1_PDB.7
IVC_CAPLINK_IVCA: R8_IVCA.1 R9_IVCA.1 R10_IVCA.1 U15_IVCA.3
IVC_CAPLINK_IVCB: R8_IVCB.1 R9_IVCB.1 R10_IVCB.1 U15_IVCB.3
IVC_CHA_ADCIN: C63.2 R75.2 U2.4
IVC_CHB_ADCIN: C60.2 R33.2 U18.4
IVC_SW_1_CHA: J1.07 U12.4
IVC_SW_1_CHB: J1.13 U12.6
IVC_SW_2_CHA: J1.05 U12.5
IVC_SW_2_CHB: J1.15 U12.7
LEDNG: D5.2
LEDPG: D6.1 D7.1 D8.1
NetC3_2: C3.2 R15.2 U3.8 | length 6.3
  Bottom Layer w0.3: U3.8@53.525,10.525 54.004,10.525 54.127,10.402 54.168,10.402 54.477,10.093 54.477,9.527 53.15,8.2 53.15,7.95 53.55,8.35 R15.2@55.5,8.35
NetC7_1: C7.1 U10.5
NetC10_2: C10.2 R21.1 R22.2 U5.5 | length 5.6
  Bottom Layer w0.3: C10.2@55.375,21.65 55.51,21.785 55.51,23.634 U5.5@55.525,23.65 55.525,23.262 55.562,23.225 R21.1@57.15,23.225 ; R21.1@57.15,23.175 57.212,23.113 58.538,23.113 R22.2@58.6,23.05
NetC11_2: C11.2 R23.1 R24.2 U5.3 | length 7.5
  Bottom Layer w0.3: U5.3@54.875,29.3 54.875,27.872 55.383,27.365 55.986,27.365 56.2,27.579 56.8,27.579 57.15,27.929 C11.2@57.15,27.975 ; R23.1@57.2,26.425 57.175,26.45 57.175,27.95 C11.2@57.15,27.975 ; R24.2@58.875,28 58.862,27.988 57.162,27.988 C11.2@57.15,27.975
NetC15_1: C15.1 L1.2 U7.1
NetC15_2: C15.2 D1.2 L2.1
NetC16_2: C16.2 R29.1 R30.2 U7.3
NetC17_1: C17.1 R30.1 R31.2
NetC21_1: C21.1 R32.1 U8.8
NetC31_PDA_2: C31_PDA.2 K1_PDA.6 R46_PDA.2
NetC31_PDB_2: C31_PDB.2 K1_PDB.6 R46_PDB.2
NetC32_IOA_2: C32_IOA.2 RT1_IOA.2 U2.32
NetC32_IOB_2: C32_IOB.2 RT1_IOB.2 U18.32
NetC59_1: C59.1 U4.1 U4.3 | length 11.1
  Bottom Layer w0.5: U4.1@42.65,20.925 42.666,20.941 42.666,21.302 43.364,22 43.901,22 44.976,20.925 ; U4.3@44.55,20.925 44.976,20.925 ; C59.1@46.55,20.975 46.5,20.925 44.976,20.925
  Bottom Layer w1: 47,16.748 47.91,16.748 48.277,17.115 48.277,19.748 C59.1@47.15,20.875
NetC67_2: C67.2 U2.23
NetC68_2: C68.2 U18.23
NetD2_1: D2.1 F2.2 U21.3
NetD5_1: D5.1 R79.1
NetD6_2: D6.2 R36.1
NetD7_2: D7.2 R18.1
NetD8_2: D8.2 R4.1
NetJ6_IOA_3: J6_IOA.3 U2.31
  other v1: 1,26.8
NetJ6_IOB_3: J6_IOB.3 U18.31
NetK1_PDA_1: K1_PDA.1 U1_PDA.4
NetK1_PDA_2: K1_PDA.2 U14.24
NetK1_PDA_3: K1_PDA.3 K2_PDA.7
NetK1_PDA_4: K1_PDA.4 U15_IVCA.2
NetK1_PDA_8: K1_PDA.8 U1_PDA.6
NetK1_PDB_1: K1_PDB.1 U1_PDB.4
NetK1_PDB_2: K1_PDB.2 U14.1
NetK1_PDB_3: K1_PDB.3 K2_PDB.7
NetK1_PDB_4: K1_PDB.4 U15_IVCB.2
NetK1_PDB_8: K1_PDB.8 U1_PDB.6
NetK2_PDA_1: K2_PDA.1 U20_PDA.4
NetK2_PDA_8: K2_PDA.8 U20_PDA.6
NetK2_PDB_1: K2_PDB.1 U20_PDB.4
NetK2_PDB_8: K2_PDB.8 U20_PDB.6
NetR3_2: R3.2 R38.2 Y1.3
NetR6_1: R6.1 Y1.1
NetR7_IVCA_1: R7_IVCA.1 U15_IVCA.1
NetR7_IVCB_1: R7_IVCB.1 U15_IVCB.1
NetR8_IVCA_2: R8_IVCA.2 U15_IVCA.6
NetR8_IVCB_2: R8_IVCB.2 U15_IVCB.6
NetR9_IVCA_2: R9_IVCA.2 U15_IVCA.5
NetR9_IVCB_2: R9_IVCB.2 U15_IVCB.5
NetR10_IVCA_2: R10_IVCA.2 U15_IVCA.4
NetR10_IVCB_2: R10_IVCB.2 U15_IVCB.4
NetR13_1: R13.1 U18.12
NetR14_2: R14.2 U3.6 | length 2.1
  Bottom Layer w0.3: U3.6@57.975,9.875 58.346,9.875 58.438,9.783 58.438,9.412 58.75,9.1 58.75,8.85 59.1,8.5 R14.2@59.15,8.5
NetR16_1: R16.1 R17.2 U3.7 | length 3.8
  Bottom Layer w0.3: R16.1@51.5,11.4 51.475,11.375 51.475,9.775 R17.2@51.45,9.75 51.537,9.837 53.487,9.837 U3.7@53.525,9.875
NetR19_1: R19.1 R62_LS1B.2 TP13.1 U17_LS1B.6
NetR20_1: R20.1 U18.13
NetR25_1: R25.1 U6.2 | length 3.2
  Bottom Layer w0.3: R25.1@50.525,34.25 50.525,34.475 51.352,35.302 51.352,36.123 50.8,36.675 U6.2@50.575,36.675
NetR25_2: R25.2 R26.2 U5.1 | length 5.8
  Bottom Layer w0.254: R25.2@50.375,33.15 51.4,33.15 51.523,33.027 51.523,32.977 53.575,30.925 U5.1@53.575,29.3
NetR26_1: R26.1 U6.5 | length 3.6
  Bottom Layer w0.3: R26.1@51.35,34.15 51.4,34.15 51.5,34.25 51.5,34.525 52.475,35.5 52.475,36.15 52.875,36.55 53.25,36.55 U6.5@53.375,36.675
NetR27_2: R27.2 U6.6 | length 1.9
  Bottom Layer w1: R27.2@52.675,34.15 52.698,34.173 52.698,34.617 53.375,35.294 U6.6@53.375,35.725
NetR28_2: R28.2 U6.4 | length 4.6
  Bottom Layer w1: U6.4@53.375,37.625 54.006,37.625 54.502,37.129 54.502,34.827 R28.2@53.825,34.15
NetR33_1: R33.1 R62_LS2B.2 TP14.1 U17_LS2B.6
NetR38_1: R38.1 U18.17
NetR39_IOA_1: R39_IOA.1 R40_IOA.2 U22_IOA.3
NetR39_IOB_1: R39_IOB.1 R40_IOB.2 U22_IOB.3
NetR52_2: R52.2 R53.2 U14.2 U14.3
NetR53_1: R53.1 U14.6
NetR54_1: R54.1 U14.8
NetR55_2: R55.2 R56.2 U14.22 U14.23
NetR56_1: R56.1 U14.19
NetR57_1: R57.1 U14.17
NetR62_LS1A_1: R62_LS1A.1 U17_LS1A.8
NetR62_LS1A_2: R62_LS1A.2 R75.1 TP9.1 U17_LS1A.6
NetR62_LS1B_1: R62_LS1B.1 U17_LS1B.8
NetR62_LS2A_1: R62_LS2A.1 U17_LS2A.8
NetR62_LS2A_2: R62_LS2A.2 R74.1 TP8.1 U17_LS2A.6
NetR62_LS2B_1: R62_LS2B.1 U17_LS2B.8
NetR77_2: R77.2 U11.1
NetR78_2: R78.2 U21.1
NetU1_PDA_1: U1_PDA.1 U2.22
NetU1_PDA_2: U1_PDA.2 U2.21
NetU1_PDB_1: U1_PDB.1 U18.22
NetU1_PDB_2: U1_PDB.2 U18.21
NetU2_19: U2.19 U20_PDA.2
NetU2_20: U2.20 U20_PDA.1
NetU9_IOA_1: U9_IOA.1 U16.15
NetU9_IOA_2: U9_IOA.2 U9_IOB.2 U12.15
NetU9_IOA_3: U9_IOA.3 U9_IOB.3 U12.14
NetU9_IOB_1: U9_IOB.1 U16.14
NetU12_10: U12.10 U15_IVCB.12
NetU12_11: U12.11 U15_IVCB.11
NetU12_12: U12.12 U15_IVCA.11
NetU12_13: U12.13 U15_IVCA.12
NetU14_7: U14.7 U17_LS1B.9
NetU14_10: U14.10 U14.15 U16.13
NetU14_11: U14.11 U14.14 U16.12
NetU14_18: U14.18 U17_LS2A.9
NetU15_IVCA_10: U15_IVCA.10 U17_LS1A.9
NetU15_IVCB_10: U15_IVCB.10 U17_LS2B.9
NetU18_19: U18.19 U20_PDB.2
NetU18_20: U18.20 U20_PDB.1
PD_A_IOA: J6_IOA.2 K2_PDA.6
PD_A_IOB: J6_IOB.2 K2_PDB.6
PD_K_IOA: C00_IOA.2 D3_IOA.1 J6_IOA.1 R0_IOA.1 R39_IOA.2 TP7_IOA.1
  other v1: 1,24.8
PD_K_IOB: C00_IOB.2 D3_IOB.1 J6_IOB.1 R0_IOB.1 R39_IOB.2 TP7_IOB.1
  other v1: 1,38.8
rSPI_MOSI: R5.2 R64.1 U2.10 U2.12 U12.3 U18.10
rSPI_SCLK: R11.2 U2.11 U12.2 U18.11
SPI_CS_DAC_CHA: J1.03 U16.2
SPI_CS_DAC_CHB: J1.17 U16.3
SPI_MISO: J1.12 R13.2 R64.2
SPI_MOSI: J1.08 R5.1
SPI_SCLK: J1.10 R11.1
STRT: J1.14 U2.8 U18.8
SYS_CLK: R3.1 U2.17
SYS_DVDD: F2.1 J1.02
SYS_GND: C1.1 C2.1 C3.1 C4.1 C5.2 C6.1 C7.2 C8.1 C9.1 C10.1 C11.1 C12.1 C13.1 C14.1 C17.2 C18.2 C19.2 C20.2 C21.2 C24.2 C25_PDA.1 C25_PDB.1 C26.1 C28_PDA.1 C28_PDB.1 C29_PDA.1 C29_PDB.1 C32_IOA.1 C32_IOB.1 C37.1 C41.1 C43_LS1A.1 C43_LS1B.1 C43_LS2A.1 C43_LS2B.1 C44_LS1A.1 C44_LS1B.1 C44_LS2A.1 C44_LS2B.1 C45_LS1A.1 C45_LS1B.1 C45_LS2A.1 C45_LS2B.1 C46_LS1A.1 C46_LS1B.1 C46_LS2A.1 C46_LS2B.1 C48.1 C49.1 C50.1 C51.1 C52.1 C53.1 C54.1 C55.1 C56.1 C57.1 C58.2 C59.2 C60.1 C61.1 C62.1 C63.1 C64.1 C65_PDA.1 C65_PDB.1 C66.1 C67.1 C68.1 C69_IOA.1 C69_IOB.1 D1.1 D2.2 D4.2 J1.18 J6_IOA.5 J6_IOA.6 J6_IOB.5 J6_IOB.6 R14.1 R15.1 R17.1 R22.1 R24.1 R31.1 R32.2 R34.2 R35.2 R40_IOA.1 R40_IOB.1 R77.1 R78.1 RT1_IOA.1 RT1_IOB.1 SH.1 U1_PDA.3 U1_PDB.3 U2.1 U2.14 U2.24 U2.27 U2.28 U2.29 U3.9 U3.13 U4.2 U5.4 U6.3 U7.2 U8.6 U8.9 U10.4 U12.8 U16.6 U16.7 U16.8 U17_LS1A.5 U17_LS1B.5 U17_LS2A.5 U17_LS2B.5 U18.1 U18.14 U18.24 U18.27 U18.28 U18.29 U20_PDA.3 U20_PDB.3 U22_IOA.2 U22_IOB.2 Y1.2 | length 13.8
  Bottom Layer w0.254: 7.5,23.96 7.52,23.94 13.73,23.94 13.75,23.92 ; 50.45,39.25 50.45,38.55 50.575,38.425 U6.3@50.575,37.625
  Bottom Layer w0.3: C10.1@57.025,21.65 C10.1@57.075,21.65 57.225,21.5 58.45,21.5 R22.1@58.6,21.35 58.625,21.325 58.625,19.775 C9.1@58.65,19.75
  Bottom Layer w1: C1.1@61,10.397 61,10.036 62.533,8.503
  other v1: 2.625,1 5.775,1 7.775,1 9.775,1 11.775,1 13.775,1 15.775,1 17.775,1 19.775,1 21.775,1 23.775,1 25.775,1 27.775,1 29.775,1 31.775,1 33.775,1 35.775,1 37.775,1 39.775,1 41.775,1 43.775,1 45.775,1 47.775,1 49.775,1 51.775,1 53.775,1 55.775,1 57.775,1 59.775,1 61.775,1 63.775,1 65.775,1 67.775,1 71.775,1 1,2.8 73,2.8 1,6.8 73,6.8 1,8.8 73,8.8 1,10.8 73,10.8 1,12.8 73,12.8 1,14.8 73,14.8 1,16.8 73,16.8 1,18.8 73,18.8 1,20.8 73,20.8 1,22.8 73,22.8 73,24.8 73,26.8 1,28.8 73,28.8 1,30.8 73,30.8 1,32.8 73,32.8 1,34.8 73,34.8 1,36.8 73,36.8 73,38.8 1,40.8 73,40.8 1,42.8 73,42.8 1,44.8 73,44.8 1,46.8 73,46.8 1,48.8 73,48.8 1,52.8 73,52.8 2.625,55 5.775,55 7.775,55 9.775,55 11.775,55 13.775,55 15.775,55 17.775,55 19.775,55 21.775,55 23.775,55 25.775,55 27.775,55 29.775,55 31.775,55 33.775,55 35.775,55 37.775,55 39.775,55 41.775,55 45.775,55 47.775,55 49.775,55 51.775,55 53.775,55 55.775,55 57.775,55 59.775,55 61.775,55 63.775,55 65.775,55 67.775,55 71.775,55
SYS_VBAT: F1.1 J1.20
SYS_VBAT_F: D4.1 F1.2 U11.3
SYS_VBAT_RB: Rsense1.2 U11.2
TIA_CHA_ADCIN: C61.2 R73.2 U2.2
TIA_CHB_ADCIN: C56.2 R12.2 U18.2
TIA_IN_PDA: C30_PDA.1 C31_PDA.1 K2_PDA.5 R45_PDA.1 R46_PDA.1
TIA_IN_PDB: C30_PDB.1 C31_PDB.1 K2_PDB.5 R45_PDB.1 R46_PDB.1
TIA_OUT_PDA: C30_PDA.2 K1_PDA.5 R45_PDA.2 R73.1 TP4.1
TIA_OUT_PDB: C30_PDB.2 K1_PDB.5 R12.1 R45_PDB.2 TP12.1
VBAT: C1.2 C2.2 C14.2 L1.1 Rsense1.1 U3.1 U3.2 U3.3 U7.5 | length 78.8
  Layer 2 w1: 47,16.748 47,17.406 49.854,20.26 50.682,20.26 53.442,17.5 58.373,17.5 60.873,15 62.75,15 63,15.25 66.5,15.25 68.25,17 68.25,34.017 65.455,36.812 65.455,40.918 64.304,42.069 64.304,42.167 63.467,43.004 63.369,43.004 60.58,45.793 60.58,46.5 ; 60.58,46.697 60.633,46.75
  Bottom Layer w0.75: 56.15,47.175 56.381,47.406 56.485,47.406 56.605,47.525 57.5,47.525 57.7,47.725 57.7,47.875 57.9,47.675 57.9,47.252 59.338,45.813 ; 59.876,45.276 59.876,44.7 60.65,44.7 61.45,45.5 61.5,45.5
  Bottom Layer w1: U3.1@57.975,13.125 U3.2@57.975,12.475 57.975,12.4 58.323,12.052 59.305,12.052 60.75,13.497 C1.2@61,13.497 62.487,13.497 ; 59.125,44.7 59.125,45.534 59.225,45.634 59.884,45.634 60.442,46.192 60.442,46.558 60.633,46.75 ; 63.5,15.25 63.25,15 62.75,15 62.487,14.737 62.487,13.497 ; C2.2@63.718,13.497 62.487,13.497
VBIAS_CHA_ADCIN: TP10.1 U2.5 U22_IOA.1 U22_IOA.4
VBIAS_CHB_ADCIN: TP15.1 U18.5 U22_IOB.1 U22_IOB.4
VBIAS_IOA: C0_IOA.2 R0_IOA.2 U9_IOA.6
VBIAS_IOB: C0_IOB.2 R0_IOB.2 U9_IOB.6
VGND_ADCIN: C66.2 R37.2 U18.6
pads on no net: K2_PDA.2 K2_PDA.3 K2_PDA.4 K2_PDB.2 K2_PDB.3 K2_PDB.4 U2.25 U3.5 U8.4 U8.7 U10.1 U10.3 U10.7 U10.8 U17_LS1A.2 U17_LS1A.3 U17_LS1A.10 U17_LS1B.2 U17_LS1B.3 U17_LS1B.10 U17_LS2A.2 U17_LS2A.3 U17_LS2A.10 U17_LS2B.2 U17_LS2B.3 U17_LS2B.10 U18.25
copper on no net: | length 1454.3
  Top Layer w0.127: 69.772,12.816 ccw(c70.23,13.177) 70.23,12.594
  Top Layer w0.2: 68.114,28.5 v2(71.545,28.5) ; 70.231,29.75 v2(71.545,29.75) ; 70.518,26 v2(71.545,26) ; 71.25,19.64 71.647,20.037 71.647,25 72.165,25.518 72.165,30.007 71.32,30.852
  Layer 1 w0.254: 34.395,12.52 34.461,12.454 34.947,12.454 34.949,12.453 35.203,12.453 36.25,13.5 42.25,13.5 43.825,15.075 43.825,16.296 43.855,16.327 43.855,16.615 43.921,16.681 ; 37.733,45.285 37.733,42.352 39.732,40.353 40.353,40.353 43.5,43.5 48,43.5 53.5,38 53.5,32.969 53.827,32.642 53.827,31.599 52.858,30.63 52.33,30.63 52.264,30.564 ; 38,27 39.961,27 41.842,25.119 41.881,25.119 44.777,22.223 52.898,22.223 ; 38,28 39.5,28 42,25.5 42.039,25.5 44.935,22.604 50.604,22.604 51.5,23.5 ; 40,41 42.881,43.881 48.619,43.881 54,38.5 54,33.008 54.208,32.8 54.208,26.974 55.627,25.555 55.627,14.587 56.837,13.377 ; 47.346,5.571 47.44,5.571 47.513,5.498 48.144,5.498 48.602,5.956 48.602,15.602 49.25,16.25 49.25,17.75 50.017,18.517 50.843,18.517 ; 47.5,44.528 48.511,44.528 54.381,38.658 54.381,33.166 55.021,32.526 55.021,32.389 55.634,31.776 55.634,28.061 55.66,28.035 ; 53.75,3.21 54.857,2.103 58.768,2.103 61.831,5.166 61.831,9.254 65.683,13.106 68.272,13.106 70.738,15.572 70.738,19.865 64.31,26.293 64.31,26.505 63.325,27.49 63.115,27.49 62.816,27.191 62.816,26.808 62.75,26.742 ; 53.768,4.75 54.724,3.794 57.794,3.794 58.119,4.119 58.119,4.551 58.211,4.643 58.211,8.446 58.674,8.909 58.674,10.392 58.119,10.948 58.119,12.128 58.627,12.636 58.627,14.927 60.7,17 64.25,17 ; 53.919,5.591 53.919,5.467 53.948,5.467 54.018,5.397 54.036,5.397 54.415,5.018 54.415,5 55.24,4.175 57.215,4.175 57.738,4.698 57.738,4.709 57.83,4.801 57.83,8.285 57.738,8.377 57.738,8.512 58.293,9.067 58.293,10.234 57.738,10.79 57.738,12.286 58.246,12.794 58.246,15.085 58.363,15.202 58.363,15.563 59.62,16.82 59.62,18.442 60.944,19.765 60.944,21.929 60.983,21.968 ; 54.75,5.786 54.732,5.768 55.506,4.994 55.506,4.728 55.678,4.556 57.057,4.556 57.228,4.728 57.228,4.738 57.449,4.959 57.449,8.128 57.357,8.219 57.357,8.67 57.912,9.225 57.912,10.077 57.277,10.712 57.277,12.364 57.865,12.952 57.865,13.803 57.069,14.599 57.069,19.785 57.8,20.516 ; 56.802,5.227 56.802,8.653 57.531,9.383 57.531,9.919 56.896,10.554 56.896,12.522 57.484,13.109 57.484,13.645 56.688,14.441 56.688,21.477 56.921,21.71 56.921,28.746 57.647,29.472 61.561,29.472 62.471,28.563 ; 57.157,3.147 57.223,3.213 57.752,3.213 58.592,4.053 58.592,8.288 59.055,8.752 59.055,10.55 58.5,11.105 58.5,11.7 60.829,14.029 64.828,14.029 65.134,14.336 65.67,14.336 65.977,14.029 68.656,14.029 70.357,15.73 70.357,19.707 64.418,25.646 63.29,25.646 62.894,25.25 62.8,25.25 ; 57.75,33.25 58.778,34.278 60.426,34.278 62.557,32.147 63.768,32.147 71.881,24.034 71.881,13.542 69.144,10.805 67.38,10.805 ; 58.75,33.25 59.397,33.897 60.268,33.897 62.853,31.312 62.853,31.232 63.676,30.409 64.318,30.409 66.378,28.349 66.378,28.262 71.5,23.14 71.5,14.076 70.987,13.563 70.71,13.563 70.324,13.177 70.23,13.177 ; 60,33.25 63.016,30.234 63.312,30.234 63.518,30.028 64.16,30.028 65.709,28.48 65.709,26.932 69.103,23.537 69.103,22.039 71.119,20.023 71.119,14.981 69.443,13.305 69.386,13.305 ; 61.396,23.604 61.396,22.471 61.63,22.236 61.63,21.7 61.396,21.466 61.396,20.604 64.353,17.647 64.518,17.647 65.248,16.917 66.346,16.917 66.725,16.538 66.725,16.399 66.873,16.25 68.762,16.25 69.5,16.988 69.5,19.5 ; 61.592,27.8 61.592,26.408 62.75,25.25 ; 61.965,24.241 61.965,24.202 62.25,23.918 62.25,20.289 63.288,19.251 65.5,19.251 ; 63.132,23.609 64.5,22.241 64.5,20
  Layer 1 w0.3: 27.5,16 29.25,14.25 42,14.25 43,15.25 ; 34.75,19.5 36,20.75
  Layer 1 w0.4: 3,34.6 3,27.419 2.646,27.065 2.646,13.354 7.25,8.75 16.25,8.75 19.5,12 21,12 35.07,26.07 39.85,26.07 41.417,24.503
  Layer 2 w0.254: 23.947,38.154 24.041,38.154 24.292,37.903 24.44,37.903 ; 47.75,2.75 47.707,2.793 47.707,3.622 48.086,4.001 48.622,4.001 48.811,3.811 49.777,3.811 49.972,4.007 49.972,4.426 50.574,5.028 50.993,5.028 55.616,9.651 56.884,9.651 ; 48.354,3.354 49.858,3.354 50.353,3.849 50.353,4.268 50.732,4.647 51.151,4.647 54.056,7.552 57.198,7.552 61.396,11.75 ; 63,12.25 65,10.25 65,7
  Layer 2 w0.3: v1(43.775,55) 43.775,54.865 44,54.64 44,52.5
  Layer 2 w0.4: 23.898,44.067 ccw(c22.898,44.067) 23.898,44.067 ; 23.898,50.163 ccw(c22.898,50.163) 23.898,50.163 ; 23.945,31.874 ccw(c22.945,31.874) 23.945,31.874 ; 26.438,37.971 ccw(c25.438,37.971) 26.438,37.971 ; 26.438,44.067 ccw(c25.438,44.067) 26.438,44.067 ; 26.438,50.163 ccw(c25.438,50.163) 26.438,50.163 ; 26.485,31.874 ccw(c25.485,31.874) 26.485,31.874
  Layer 2 w0.5: 61.79,3.822 63.513,3.822 67.945,8.254 69.001,8.254 71,10.253 71,15.127 70.75,15.377 70.75,35.911 71.02,36.181 71.02,39.328 70.75,39.598 70.75,41.075 71.112,41.437 ; 8.6,26.5 ccw(c7.5,26.5) 8.6,26.5 ; 8.6,29.04 ccw(c7.5,29.04) 8.6,29.04 ; 14.85,26.46 ccw(c13.75,26.46) 14.85,26.46 ; 14.85,29 ccw(c13.75,29) 14.85,29
  Layer 2 w1: 4.5,33.75 5.854,32.396 10.102,32.396 13.176,35.47 13.176,35.926 16.25,39 16.25,40.25
  Bottom Layer w0.127: 23.947,38.154 24.386,38.154 24.446,38.094 ; 25.3,33.9 25.662,34.262 26.015,34.262 26.544,34.791 28.027,34.791 28.318,34.5 28.5,34.5 ; 36.85,8.25 36.9,8.25 36.9,6.5 36.883,6.5 36.293,5.91 36.293,5.707 36.202,5.616 37.116,5.616 37.25,5.75 ; 60,33.25 63.345,29.905 64.887,29.905 ; 61.592,27.8 62.835,27.8 63.008,27.628 63.491,27.628 63.807,27.944 64.755,27.944 64.887,28.076 64.887,28.635 ; 61.668,25.418 61.668,26.418 62.166,26.916 62.166,26.984 62.508,27.325 62.992,27.325 63.067,27.25 64.5,27.25 ; 62.75,26.75 62.758,26.742 67.122,26.742 67.745,27.365 68.113,27.365 ; 63.132,23.609 63.132,23.737 62.917,23.952 62.917,24.742 63.258,25.083 64.629,25.083 64.887,24.825 ; 63.208,32.869 63.208,32.759 63.5,32.467 63.5,31.5 ; 64.25,17 62.917,18.333 62.917,21.343 63.5,21.926 63.5,22.426 63.426,22.5 62.75,22.5 62.5,22.75 62.5,23.95 62.549,23.999 62.549,24.482 62.5,24.531 62.5,25.272 62.574,25.347 63.77,25.347 64.519,26.095 64.887,26.095 ; 68.386,26 69.713,27.327 70.469,27.327 70.546,27.25 v2(71.545,27.25)
  Bottom Layer w0.2: 47.5,45.456 47.5,45.405 49.153,43.752 54.192,43.752 57.177,40.767 57.177,40.136 57.5,39.813 57.5,36.009 56.147,34.656 56.147,32.177 ; 47.5,46.75 47.577,46.673 47.577,46.327 48.27,45.633 48.27,45.097 49.288,44.079 54.328,44.079 57.504,40.903 57.504,40.289 57.827,39.966 57.827,35.519 57.001,34.693 57.001,32.162 ; 63.249,28.212 63.326,28.288 63.326,28.5 64.056,29.23 65.638,29.23 66.045,29.637 67.887,29.637 68.25,30 ; 65.2,32.5 65.93,31.77 71.5,31.77 v2(71.52,31.75) ; 65.45,17.63 67.38,17.63 68.88,19.13 68.88,19.757 69.243,20.12 69.87,20.12 70.29,20.54 70.29,25.04 71,25.75 ; 68.25,31.25 68.406,31.25 69.677,29.979 71.021,29.979 71.173,29.827 71.468,29.827 v2(71.545,29.75) ; 68.406,24.75 69.693,26.037 70.713,26.037 71,25.75 ; 68.5,28.749 68.749,28.5 v2(71.545,28.5) ; v2(71.545,26) 71.437,26 71.187,25.75 71,25.75
  Bottom Layer w0.254: 9.9,17.5 9.9,9.6 16,3.5 35.248,3.5 35.303,3.445 37.102,3.445 37.879,4.222 39.813,4.222 40.448,4.857 44.728,4.857 47.482,2.103 48.018,2.103 48.097,2.182 54.176,2.182 54.494,2.5 58.75,2.5 62.603,6.353 63.051,6.353 63.222,6.524 64.278,6.524 64.449,6.353 65.268,6.353 65.75,6.835 65.75,7.363 65.544,7.569 65.544,8.19 65.484,8.25 64.236,8.25 62.25,10.236 62.25,11.5 ; 27.04,21.907 27.04,21.857 29.25,19.647 29.25,4.25 29.619,3.881 35.406,3.881 35.461,3.826 36.944,3.826 36.999,3.881 37.721,4.603 39.655,4.603 40.052,5 40.29,5.238 44.886,5.238 45.124,5 46.243,3.881 47.108,3.016 47.39,3.016 47.656,2.75 47.75,2.75 ; 27.05,34.05 29.631,31.469 29.631,4.411 29.78,4.262 35.564,4.262 35.619,4.207 36.786,4.207 37.563,4.984 39.498,4.984 40.133,5.619 45.044,5.619 47.266,3.397 48.311,3.397 48.354,3.354 ; 27.092,46.003 27.092,42.019 27.414,41.697 27.414,40.52 30.012,37.922 30.012,4.792 30.161,4.643 35.722,4.643 35.777,4.588 36.628,4.588 37.405,5.365 39.34,5.365 39.975,6 45.995,6 47.072,4.924 47.699,4.924 48.722,3.9 49.1,3.9 49.822,3.178 52.866,3.178 53.482,2.563 54.018,2.563 55.249,3.794 59.209,3.794 62.415,7 65,7 ; 34.395,12.52 36,10.915 36,9.75 ; 37.247,5.746 39.182,5.746 45,11.564 45,15.5 44.472,16.028 ; 40,41 40.066,41.066 40.166,41.066 ; 63.5,24.5 63.594,24.5 63.916,24.177 65.729,24.177 66.351,23.555 68.113,23.555 ; 63.754,21.111 64.555,21.111 66.813,18.853 67.498,18.853 67.877,19.232 67.877,20.933 65.255,23.555 64.887,23.555 ; 64.887,22.285 65.255,22.285 65.497,22.044 65.497,21.233 67.23,19.5
  Bottom Layer w0.3: 9.85,20.975 9.875,20.95 9.875,19.025 9.9,19 ; 22.494,36.483 23.82,36.483 23.945,36.358 24.619,36.358 24.689,36.358 24.758,36.427 25.842,36.427 25.902,36.367 26.298,36.367 26.508,36.577 27.592,36.577 27.811,36.358 27.931,36.358 ; 35.45,50.625 36.342,51.517 37.278,51.517 ; 37.278,51.067 36.875,51.067 36.586,50.778 36.586,49.389 36.675,49.3 36.675,48.9 37,48.575 37,48.725 37.325,49.05 38.55,49.05 ; 38.719,51.742 39.394,51.067 40.16,51.067 ; 40.25,49.05 41.975,49.05 42.125,48.9 ; 44,52.5 44.05,52.45 44.85,52.45 45.275,52.025 45.275,51.875 ; 46.821,6.279 46.821,9.529 46.821,12.779 ; 48.775,52.05 48.775,51.926 49.1,51.601 49.524,51.601 50.268,50.857 53.068,50.857 53.125,50.8 ; 51.525,51.875 51.648,51.752 53.848,51.752 54.625,50.975 54.625,50.8 ; 51.646,49.909 51.649,49.909 51.828,49.73 51.828,49.322 52.875,48.275 53.2,48.275 53.35,48.125 ; 53.35,49.075 53.55,49.075 53.7,49.225 53.7,49.7 54.625,50.625 ; 54.746,50.679 57.625,50.679 ; 57.55,52.15 57.9,51.8 58.125,51.8 59.375,50.55 59.375,50.25 59.375,50.146 58.95,49.721 57.625,49.721
  Bottom Layer w0.4: 11.6,17.5 11.6,19 11.625,19.025 11.625,20.95 11.65,20.975 ; 20.358,37.971 20.358,37.954 19.589,37.184 19.589,35.699 20.288,35 20.5,35 ; 20.358,44.067 20.358,46.858 ; 20.358,50.163 20.358,50.001 20.929,49.43 20.929,47.179 20.75,47 ; 20.405,31.874 20.506,31.975 20.506,34.931 20.506,34.994 ; 20.429,19.682 20.429,21.078 20.75,21.399 20.75,24.088 20.429,24.409 20.429,25.778 ; 20.607,34.931 20.857,34.931 22.226,36.3 22.311,36.3 22.494,36.483 ; 20.682,22.757 20.932,22.757 22.659,24.484 27.602,24.484 28.611,23.475 ; 20.734,46.853 20.984,46.853 22.711,48.58 27.654,48.58 27.919,48.315 27.919,47.939 28.5,47.358 28.5,47.25 ; 23.157,35.831 25.294,35.831 ; 23.232,23.657 23.257,23.632 25.261,23.632 25.286,23.607 27.04,23.607 ; 23.284,47.753 23.309,47.728 25.313,47.728 25.338,47.703 27.092,47.703 ; 25.3,35.825 27.1,35.825 ; 27.931,36.358 28.75,35.539 28.75,35.5 ; 23.898,37.971 ccw(c22.898,37.971) 23.898,37.971 ; 23.898,44.067 ccw(c22.898,44.067) 23.898,44.067 ; 23.898,50.163 ccw(c22.898,50.163) 23.898,50.163 ; 23.945,31.874 ccw(c22.945,31.874) 23.945,31.874 ; 26.438,37.971 ccw(c25.438,37.971) 26.438,37.971 ; 26.438,44.067 ccw(c25.438,44.067) 26.438,44.067 ; 26.438,50.163 ccw(c25.438,50.163) 26.438,50.163 ; 26.485,31.874 ccw(c25.485,31.874) 26.485,31.874
  Bottom Layer w0.5: 35.3,50.625 35.4,50.525 35.4,48.675 35.5,48.575 ; 58.447,38.2 58.447,38.227 58.571,38.351 58.571,39.171 58.621,39.221 58.821,39.221 60.971,39.221 61.75,40 ; 58.821,37.321 58.85,37.321 58.9,37.271 58.9,35.75 ; 61.421,38.271 61.696,37.995 61.696,34.691 61.75,34.637 61.75,32.161 63.181,30.73 64.074,30.73 64.519,31.175 64.887,31.175 ; 62.875,41.575 64.45,40 66.75,40 67.721,39.029 70.23,39.029 70.23,36.572 ; 68.113,32.445 68.231,32.563 68.813,32.563 70.25,34 70.25,36.5 ; 70.75,44.223 70.75,44.25 ; 8.6,26.5 ccw(c7.5,26.5) 8.6,26.5 ; 8.6,29.04 ccw(c7.5,29.04) 8.6,29.04 ; 14.85,26.46 ccw(c13.75,26.46) 14.85,26.46 ; 14.85,29 ccw(c13.75,29) 14.85,29